# Altium PCB PCB1.PcbDoc (part 2 of 2)
Units mil, origin at the board's own origin, x right, y up, seen from the top; angles counter-clockwise.
Board outline 2930 x 2020 mil, 2 copper layers (Top Layer, Bottom Layer); 49 components, 43 nets, 248 pads, 108 vias.
Unrouted connection lines stored in the file: 2.
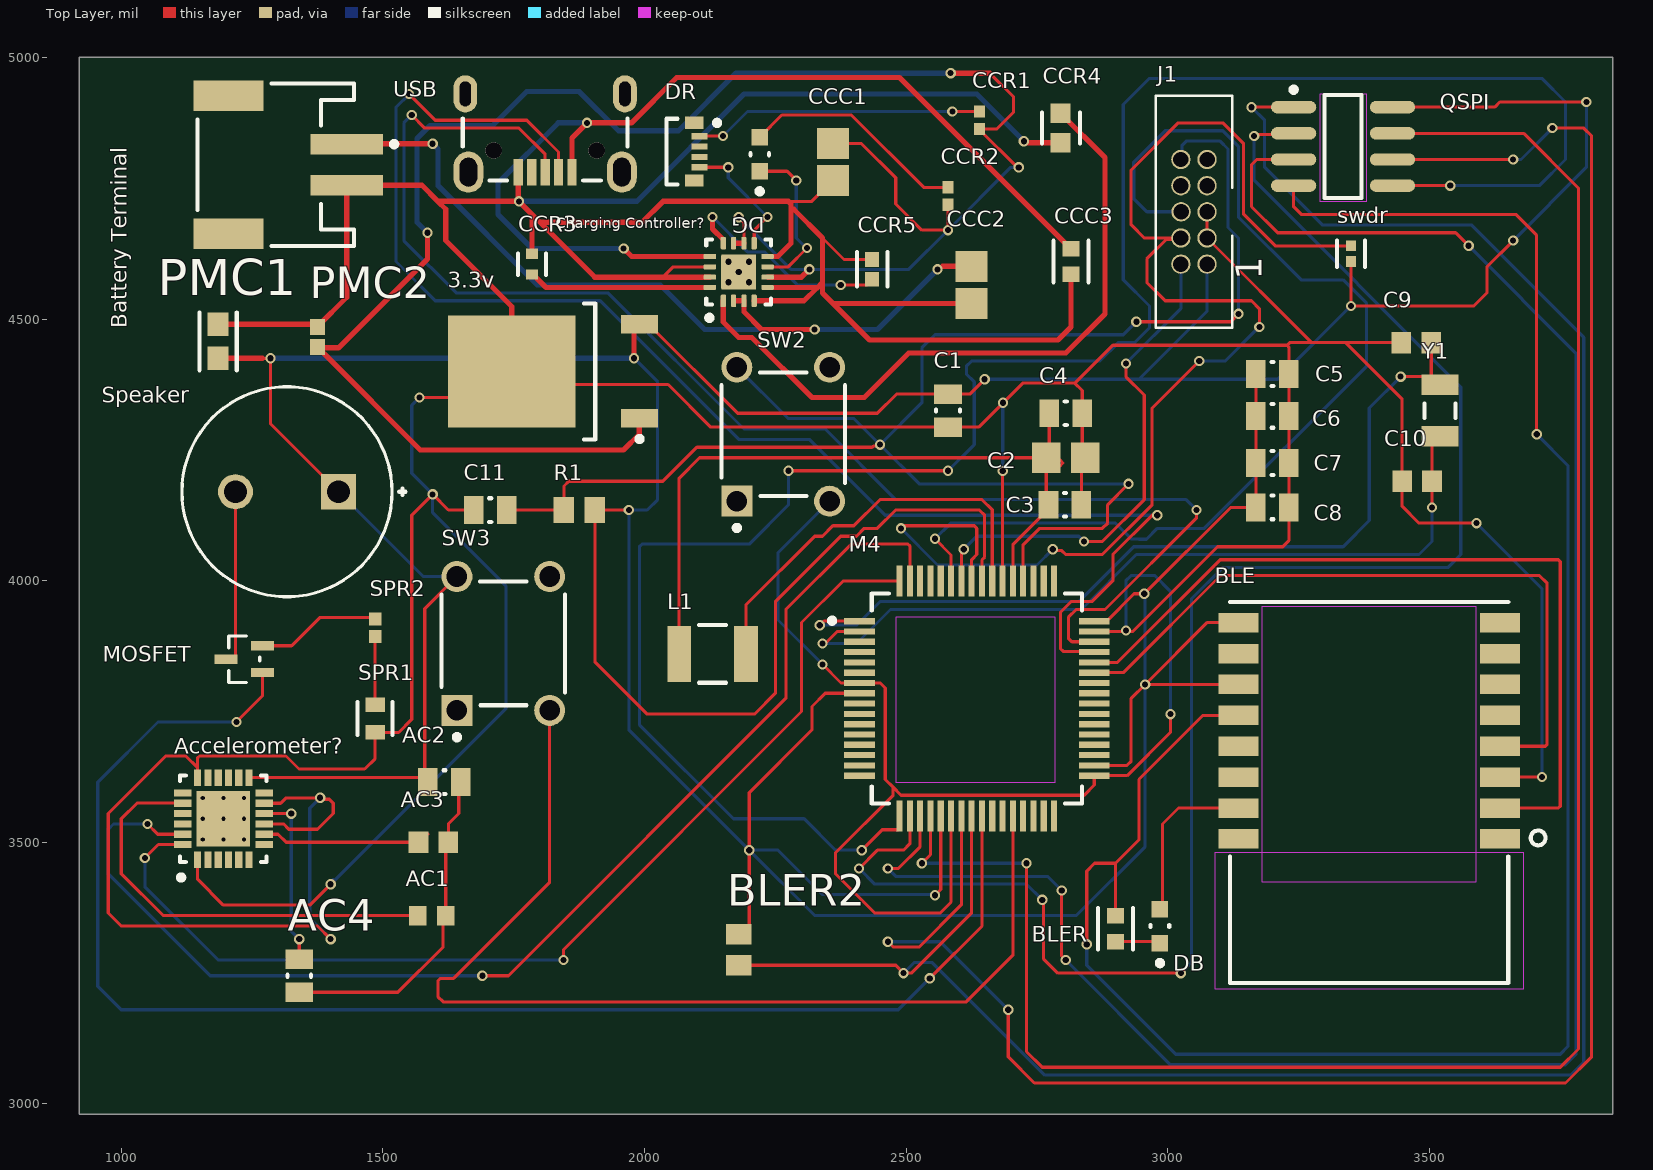
[diagram p0: Top Layer view]

## Via types
v1: diameter 19.68, hole 11.81, Top Layer to Bottom Layer, 99 vias
v2: diameter 19.68, hole 7.87, Top Layer to Bottom Layer, 9 vias

## Nets (pads, with @x,y where several pads share a name; then routed paths per layer and width w, separated by ;. In a path a pad name is that pad's centre, name@x,y a point inside that pad or via, vN(x,y) a via of type N, cw(c..) or ccw(c..) an arc to the next point about the centre after c; other vN are vias at no path point) (continued)
NetMOSFET_2: (continued)
  Top Layer w6: MOSFET.2 1325.59,3875.59 1380,3930 1481.73,3930 SPR2.2
NetMOSFET_3: MOSFET.3 Speaker.2 | length 334.7
  Top Layer w6: MOSFET.3 1212.27,3850 1218.15,3855.87 Speaker.2
NetQSPI_2: M4.18 QSPI.2 | length 3247
  Top Layer w6: v1(2410,3450) 2445,3485 2495,3485 2507.05,3497.05 M4.18 ; v1(2760,3390) 2762.32,3387.68 2762.32,3277.68 2790,3250 v1(3025,3250) ; v1(3165,4850) 3167.5,4852.5 3238.01,4852.5 QSPI.2
  Bottom Layer w6: v1(2410,3450) 2440,3420 2730,3420 v1(2760,3390) ; v1(3025,3250) 3045,3270 3045,3965 3105,4025 3535,4025 3560,4050 3560,4370 3165,4765 v1(3165,4850)
NetQSPI_3: M4.19 QSPI.3 | length 3930.3
  Top Layer w6: v1(2465,3450) 2485,3450 2526.73,3491.73 M4.19 ; v1(2797.19,3407.81) 2797.19,3282.81 v1(2805,3275) ; QSPI.3 3170,4805 3160,4795 3160,4715 3210,4665 3550,4665 v1(3575,4640)
  Bottom Layer w6: v1(2465,3450) 2480,3435 2770,3435 v1(2797.19,3407.81) ; v1(2805,3275) 3005,3075 3760,3075 3780,3095 3780,4435 v1(3575,4640)
NetQSPI_5: M4.17 QSPI.5 | length 4066.1
  Top Layer w6: v1(2275,4210) v1(2580,4210) ; v1(2415,3485) 2454.06,3524.06 2484.46,3524.06 2487.36,3526.97 M4.17 ; QSPI.5 v1(3540,4755)
  Bottom Layer w6: v1(2275,4210) 2275,4145 2200,4070 1995,4070 1990,4065 1990,3725 2170,3545 2305,3545 2365,3485 v1(2415,3485) ; v1(2580,4210) 2630,4260 2630,4380 2615,4395 2615,4410 2625,4420 2870,4420 2905,4455 2936.49,4455 2965,4483.51 2965,4525 2915,4575 2915,4910 2965,4960 3715,4960 3760,4915 3760,4805 3710,4755 v1(3540,4755)
NetQSPI_6: M4.23 QSPI.6 | length 4049.9
  Top Layer w6: v1(2465,3310) 2475,3300 2525,3300 2605.47,3380.47 M4.23 ; v1(2695,3180) 2695,3090 2745,3040 3760,3040 3810,3090 3810,4850 3795,4865 v1(3735,4865) ; QSPI.6 v1(3660,4805)
  Bottom Layer w6: v1(2465,3310) 2565,3310 v1(2695,3180) ; v1(3660,4805) 3675,4805 v1(3735,4865)
NetQSPI_7: M4.20 QSPI.7 | length 3783.3
  Top Layer w6: v1(2530,3460) 2546.42,3476.42 M4.20 ; v1(2730,3460) 2730,3100 2760,3070 3750,3070 3785,3105 3785,4750 3680,4855 QSPI.7
  Bottom Layer w6: v1(2530,3460) v1(2730,3460)
NetSPR1_2: SPR1.2 SPR2.1 | length 130.1
  Top Layer w6: SPR1.2 SPR2.1
NetSW3_3: M4.28 SW3.3 | length 2056.7
  Top Layer w6: SW3.3 1818.58,3423.58 1635,3240 1610,3240 1605,3235 1605,3205 1615,3195 2615,3195 2703.9,3283.9 M4.28
NetU?_45: M4.45 USB.2 | length 2784.2
  Top Layer w6: v1(1550,4930) 1600,4880 1775,4880 1835.59,4819.41 USB.2 ; M4.45 2857.99,3865 2800,3865 2795,3870 2795,3940 2815,3960 2855,3960 2895,4000 2895,4050 2970,4125 v1(2980,4125)
  Bottom Layer w6: v1(1550,4930) 1525,4905 1525,4610 1600,4535 1915,4535 2180,4270 2315,4270 2460,4125 v1(2980,4125)
NetU?_46: M4.46 USB.3 | length 2725.7
  Top Layer w6: v1(1555,4890) 1580,4865 1760,4865 1810,4815 USB.3 ; M4.46 2816.73,3883.27 2810,3890 2810,3930 2825,3945 2880,3945 3055,4120 v1(3055,4135)
  Bottom Layer w6: v1(1555,4890) 1540,4875 1540,4650 1640,4550 1930,4550 2190,4290 2345,4290 2480,4155 3035,4155 v1(3055,4135)
pads on no net: "Battery Terminal.MP1" "Battery Terminal.MP2" "Charging Controller?.17"@2180,4590 Accelerometer?.2 Accelerometer?.3 Accelerometer?.4 Accelerometer?.5 Accelerometer?.6 Accelerometer?.7 Accelerometer?.12 Accelerometer?.14 Accelerometer?.15 Accelerometer?.16 Accelerometer?.17 Accelerometer?.19 Accelerometer?.21 Accelerometer?.22 Accelerometer?.25 BLE.1 BLE.5 BLE.6 BLE.7 BLE.8 BLE.10 BLE.13 BLE.14 BLE.16 DR.1 DR.3 DR.4 DR.6 J1.7 J1.8 J1.9 M4.3 M4.4 M4.5 M4.6 M4.9 M4.10 M4.11 M4.12 M4.13 M4.14 M4.15 M4.16 M4.26 M4.27 M4.29 M4.30 M4.31 M4.32 M4.35 M4.36 M4.37 M4.38 M4.39 M4.40 M4.41 M4.42 M4.49 M4.50 M4.51 M4.60 M4.61 M4.62 SW2.1 SW2.4 SW3.1 SW3.4 USB.4 USB.MH1 USB.MH2 USB.Shell
copper on no net:
  other v2: 1155.63,3505.63 1195,3505.63 1234.37,3505.63 1155.63,3545 1195,3545 1234.37,3545 1155.63,3584.37 1195,3584.37 1234.37,3584.37

## Keep-outs
Top Layer:
  rectangle: 3290,4725 3380,4930
  rectangle: 2480,3615 2785,3930
  rectangle: 3090,3220 3680,3480
  rectangle: 3180,3425 3590,3950
Bottom Layer:
  rectangle: 3290,4725 3380,4930
  rectangle: 2480,3615 2785,3930
  rectangle: 3090,3220 3680,3480
  rectangle: 3180,3425 3590,3950

## Silkscreen, mask and mechanical layers (free items; w line width, h text height)
Mechanical 1:
  the board outline again, w10

## Text inside footprints (layer, text, board x,y; h text height)
J1: Top Overlay "1" at 3180.02,4574.98 h50.04 r90
USB: Top 3D Body "PCB Edge" at 1861.18,5024.92 h16 r180